# EAGLE board CT_schematic (EAGLE 7.6.0)

Size 100 x 80 mm. Coordinates in mm from the lower left corner, seen from the top.
Outline: 0,0 100,0 100,80 0,80 0,0
Copper layers (1*16): Top 0.035mm / dielectric 1.5mm / Bottom 0.035mm
Design rules "default": minimum track width 10mil, minimum drill 24mil, track to track 8mil, track to pad 8mil, pad to pad 8mil, via to via 8mil, smd to smd 8mil, copper to edge 40mil, drill to drill 8mil, minimum pad ring 10mil, minimum via ring 8mil, stop-mask expansion 4mil, vias tented up to drill 0mil, thermal gap 10mil

## Footprints (pad centres in the part's own frame; a part is rotated, then mirrored left to right if it is on the bottom)
C0603 = smd 0.8 x 0.8: 1 -0.762,0; 2 0.762,0
C0402 = smd 0.5 x 0.5: 1 -0.508,0; 2 0.508,0
C1210 = smd 1.2 x 2.5: 1 -1.524,0; 2 1.524,0
C1206 = smd 1.3 x 1.6: 1 -1.524,0; 2 1.524,0
L0603 = smd 0.8 x 0.8: 1 -0.762,0; 2 0.762,0
R0603 = smd 0.8 x 0.8: 1 -0.762,0; 2 0.762,0
LQFP48 = smd 0.3 x 1.2: 1 -2.75,-4.25; 2 -2.25,-4.25; 3 -1.75,-4.25; 4 -1.25,-4.25; 5 -0.75,-4.25; 6 -0.25,-4.25; 7 0.25,-4.25; 8 0.75,-4.25; 9 1.25,-4.25; 10 1.75,-4.25; 11 2.25,-4.25; 12 2.75,-4.25; 25 2.75,4.25; 26 2.25,4.25; 27 1.75,4.25; 28 1.25,4.25; 29 0.75,4.25; 30 0.25,4.25; 31 -0.25,4.25; 32 -0.75,4.25; 33 -1.25,4.25; 34 -1.75,4.25; 35 -2.25,4.25; 36 -2.75,4.25 | smd 1.2 x 0.3: 13 4.25,-2.75; 14 4.25,-2.25; 15 4.25,-1.75; 16 4.25,-1.25; 17 4.25,-0.75; 18 4.25,-0.25; 19 4.25,0.25; 20 4.25,0.75; 21 4.25,1.25; 22 4.25,1.75; 23 4.25,2.25; 24 4.25,2.75; 37 -4.25,2.75; 38 -4.25,2.25; 39 -4.25,1.75; 40 -4.25,1.25; 41 -4.25,0.75; 42 -4.25,0.25; 43 -4.25,-0.25; 44 -4.25,-0.75; 45 -4.25,-1.25; 46 -4.25,-1.75; 47 -4.25,-2.25; 48 -4.25,-2.75
SAMTEC_FTSH-105-01-L-DV-K = smd 0.762 x 2.794: 1 -2.54,-2.032; 2 -2.54,2.032; 3 -1.27,-2.032; 4 -1.27,2.032; 5 0,-2.032; 6 0,2.032; 7 1.27,-2.032; 8 1.27,2.032; 9 2.54,-2.032; 10 2.54,2.032
FCI_10118193-0001LF = smd 0.4 x 1.35: 1 -1.3,2.675; 2 -0.65,2.675; 3 0,2.675; 4 0.65,2.675; 5 1.3,2.675 | smd 1.6 x 1.4: 6 -3.2,2.45; 7 3.2,2.45 | smd 1.9 x 1.9: 8 -1.2,0; 9 1.2,0 | hole 0.5: -3.3,0; 3.3,0
SOT143B = smd 1 x 0.7: 1 -0.75,-1 | smd 0.6 x 0.7: 2 0.95,-1; 3 0.95,1; 4 -0.95,1
ABS07-32.768KHZ-7-T = smd 1.1 x 2.4: 1 -2.5,0; 2 0,0
ASFL1 = smd 1.7 x 1.5: 1 -1.27,-1.1; 2 1.27,-1.1; 3 1.27,1.1; 4 -1.27,1.1
SOIC-8_EP = smd 1.6 x 0.533: 1 -2.921,1.905; 2 -2.921,0.635; 3 -2.921,-0.635; 4 -2.921,-1.905; 5 2.921,-1.905; 6 2.921,-0.635; 7 2.921,0.635; 8 2.921,1.905 | smd 2.54 x 3.302: EPAD 0,0 | drill 0.406 pad 0.406: P$1 -0.508,0.635; P$2 0.381,0.635; P$3 -0.508,-0.635; P$4 0.381,-0.635
DFN8_2X3MC = smd 0.813 x 0.305: 1 -1.398,0.75; 2 -1.398,0.25; 3 -1.398,-0.25; 4 -1.398,-0.75; 5 1.398,-0.75; 6 1.398,-0.25; 7 1.398,0.25; 8 1.398,0.75 | smd 1.753 x 1.549: 9 0,0
JST-2-SMD = smd 1 x 4.6: 1 -1,-3.7; 2 1,-3.7 | smd 1.6 x 3.4: NC1 -3.4,1.5; NC2 3.4,1.5
SON-6 = smd 0.55 x 0.3: 1 -0.355,0.5 | smd 0.52 x 0.3: 2 -0.37,0; 3 -0.37,-0.5; 4 0.37,-0.5; 5 0.37,0; 6 0.37,0.5
SW_4-1437565-2 = smd 1.4 x 2.1: 1 -2.23,4.55; 2 -2.23,-4.55; 3 2.23,4.55; 4 2.23,-4.55
LGM67K-G1J2-24-Z = smd 0.8 x 1.4: A -2,0; C 0,0
NC7SZ125M5X = smd 1.3 x 0.7: 1 -1.3,0.95; 2 -1.3,0; 3 -1.3,-0.95; 4 1.3,-0.95; 5 1.3,0.95
DUMMY_PACKAGE_116 = drill 0.3: 1 0,-1; 2 1.5,-1; 3 3,-1

## Placement (x,y rotation side)
C1  1e-07  [C0603]  -38.1,49.53 0 top  (outside the outline)
C2  1e-07  [C0603]  -41.91,49.53 0 top  (outside the outline)
C3  1e-07  [C0603]  -45.72,49.53 0 top  (outside the outline)
C4  1e-07  [C0603]  -49.53,49.53 0 top  (outside the outline)
C5  4.7e-06  [C0603]  -34.29,49.53 0 top  (outside the outline)
C6  1e-08  [C0603]  -53.34,49.53 0 top  (outside the outline)
C7  1e-06  [C0603]  -57.15,49.53 0 top  (outside the outline)
C8  1e-07  [C0603]  -60.96,49.53 0 top  (outside the outline)
C9  1e-11  [C0402]  -45.72,54.61 0 top  (outside the outline)
C10  1e-11  [C0402]  -49.53,54.61 0 top  (outside the outline)
C11  1e-07  [C0402]  -53.34,54.61 0 top  (outside the outline)
C12  1e-08  [C0402]  -57.15,54.61 0 top  (outside the outline)
C13  1e-05  [C1210]  -29.21,38.1 0 top  (outside the outline)
C14  1e-05  [C1210]  -35.56,38.1 0 top  (outside the outline)
C15  1e-05  [C1210]  -41.91,38.1 0 top  (outside the outline)
C16  1e-05  [C1210]  -48.26,38.1 0 top  (outside the outline)
C17  1e-07  [C0402]  -60.96,54.61 0 top  (outside the outline)
C18  1e-05  [C1206]  -54.61,38.1 0 top  (outside the outline)
C19  1e-05  [C1206]  -60.96,38.1 0 top  (outside the outline)
C20  1e-08  [C0402]  -15.24,59.69 0 top  (outside the outline)
C21  1e-08  [C0402]  -19.05,59.69 0 top  (outside the outline)
F1  240.0  [L0603]  -15.24,54.61 0 top  (outside the outline)
R1  10000.0  [R0603]  -46.99,44.45 0 top  (outside the outline)
R2  1000.0  [R0603]  -19.05,54.61 0 top  (outside the outline)
R3  1600.5  [R0603]  -22.86,54.61 0 top  (outside the outline)
R4  4700.0  [R0603]  -26.67,54.61 0 top  (outside the outline)
R5  10000.0  [R0603]  -52.07,44.45 0 top  (outside the outline)
R6  10000.0  [R0603]  -57.15,44.45 0 top  (outside the outline)
R7  10000.0  [R0603]  -62.23,44.45 0 top  (outside the outline)
R8  10000.0  [R0603]  -15.24,49.53 0 top  (outside the outline)
R9  5.0  [R0603]  -30.48,54.61 0 top  (outside the outline)
R10  4031.5447154472  [R0603]  -31.75,44.45 0 top  (outside the outline)
R11  2200.0  [R0603]  -34.29,54.61 0 top  (outside the outline)
R12  10000.0  [R0603]  -20.32,49.53 0 top  (outside the outline)
R13  10000.0  [R0603]  -25.4,49.53 0 top  (outside the outline)
R14  9100.0  [R0603]  -38.1,54.61 0 top  (outside the outline)
R15  680000.0  [R0603]  -36.83,44.45 0 top  (outside the outline)
R16  120000.0  [R0603]  -41.91,44.45 0 top  (outside the outline)
R17  2000.0  [R0603]  -41.91,54.61 0 top  (outside the outline)
R18  10000.0  [R0603]  -30.48,49.53 0 top  (outside the outline)
U1  STM32L052C6T6  [LQFP48]  -39.37,20.32 0 top  (outside the outline)
U2  FTSH-105-01-L-DV-K  [SAMTEC_FTSH-105-01-L-DV-K]  -35.56,7.62 0 top  (outside the outline)
U3  10118193-0001LF  [FCI_10118193-0001LF]  -19.05,29.21 0 top  (outside the outline)
U4  prtr5v0u2ax  [SOT143B]  -31.75,59.69 0 top  (outside the outline)
U5  ABS07-32.768KHZ-7-T  [ABS07-32.768KHZ-7-T]  -39.37,29.21 0 top  (outside the outline)
U6  ASFL1-25MHZ-NCS  [ASFL1]  -58.42,19.05 0 top  (outside the outline)
U7  MIC5234YME  [SOIC-8_EP]  -48.26,29.21 0 top  (outside the outline)
U8  MCP73831T-2ACI/MC  [DFN8_2X3MC]  -46.99,58.42 0 top  (outside the outline)
U9  S2B-PH-SM4-TB(LF)(SN)  [JST-2-SMD]  -22.86,21.59 0 top  (outside the outline)
U10  TPS3895ADRYR  [SON-6]  -40.64,58.42 0 top  (outside the outline)
U11  4-1437565-2  [SW_4-1437565-2]  -57.15,6.35 0 top  (outside the outline)
U12  Q65110A2395  [LGM67K-G1J2-24-Z]  -17.78,38.1 0 top  (outside the outline)
U13  nc7sz125m5x  [NC7SZ125M5X]  -15.24,43.18 0 top  (outside the outline)
U14  nc7sz125m5x  [NC7SZ125M5X]  -21.59,43.18 0 top  (outside the outline)
U15  Dummy  [DUMMY_PACKAGE_116]  -38.1,59.69 0 top  (outside the outline)

## Library data of the parts
C1-C21 F1 R1-R18 U1-U15 = circuit_tree

## Nets
CLK_CRYSTAL_U1_3: C9.1 U1.3 U5.1
CLK_CRYSTAL_U1_4: C10.1 U1.4 U5.2
CLK_U1_5: U1.5 U6.3
GND: C1.2 C2.2 C3.2 C4.2 C5.2 C6.2 C7.2 C8.2 C9.2 C10.2 C11.2 C12.2 C13.2 C14.2 C15.2 C16.2 C17.2 C18.2 C19.2 C20.2 C21.2 R2.2 R5.2 R9.2 R11.2 R14.2 R16.2 R17.2 U1.8 U1.23 U1.35 U1.47 U2.3 U2.5 U3.5 U3.6 U3.7 U3.8 U3.9 U4.1 U6.2 U7.7 U7.EPAD U8.6 U8.9 U9.2 U10.2 U12.C U13.2 U13.3 U14.1 U14.3 U15.1
INPUT_USBPOWER_5V: C18.1 R18.2 U3.1 U4.4 U8.1 U8.2
NET_U1_7: R4.1 U1.7 U14.4
NET_U1_9: C6.1 C7.1 F1.1 U1.9
NET_U1_44: R5.1 U1.44
NET_U1_45: R3.1 U1.45 U12.A
NET_U1_46: R1.1 U1.46 U11.3 U11.4
NET_U2_9: R9.1 U2.9
NET_U7_4: R10.2 R11.1 U7.4
NET_U8_5: R18.1 U8.5
NET_U8_8: R17.1 U8.8
NET_U10_1: R13.1 R14.1 U10.1
NET_U10_3: R15.2 R16.1 U10.3
NET_U10_4: R12.1 U10.4 U13.4 U14.2
NET_U11_1: R2.1 U11.1 U11.2
PROC_SYS_SWCLK: R7.1 U1.37 U2.4
PROC_SYS_SWDIO: R8.1 U1.34 U2.2
PROC_TIM2_CH1: U1.10 U15.3
PROC_TIM2_CH3: U1.12 U15.2
PROC_USB_DM: U1.32 U3.2 U4.3
PROC_USB_DP: U1.33 U3.3 U4.2
RST_OUT_U2_JTAG_RST_B: R6.1 U2.10 U13.1
VCC_S1_3V7: C13.1 C14.1 C19.1 U7.5 U7.8 U8.3 U8.4 U9.1
VCC_TIER1_3V3: C1.1 C2.1 C3.1 C4.1 C5.1 C8.1 C11.1 C12.1 C15.1 C16.1 C17.1 C20.1 C21.1 F1.2 R1.2 R3.2 R4.2 R6.2 R7.2 R8.2 R10.1 R12.2 R13.2 R15.1 U1.1 U1.24 U1.36 U1.48 U2.1 U6.4 U7.1 U10.6 U13.5 U14.5

## Tracks (layer width: path | path; a pad name or v marks a point on that pad's centre or on a via)
CLK_CRYSTAL_U1_3  (2 unrouted)
CLK_CRYSTAL_U1_4  (2 unrouted)
CLK_U1_5  (1 unrouted)
GND  (52 unrouted)
INPUT_USBPOWER_5V  (5 unrouted)
NET_U1_7  (2 unrouted)
NET_U1_9  (3 unrouted)
NET_U1_44  (1 unrouted)
NET_U1_45  (2 unrouted)
NET_U1_46  (3 unrouted)
NET_U2_9  (1 unrouted)
NET_U7_4  (2 unrouted)
NET_U8_5  (1 unrouted)
NET_U8_8  (1 unrouted)
NET_U10_1  (2 unrouted)
NET_U10_3  (2 unrouted)
NET_U10_4  (3 unrouted)
NET_U11_1  (2 unrouted)
PROC_SYS_SWCLK  (2 unrouted)
PROC_SYS_SWDIO  (2 unrouted)
PROC_TIM2_CH1  (1 unrouted)
PROC_TIM2_CH3  (1 unrouted)
PROC_USB_DM  (2 unrouted)
PROC_USB_DP  (2 unrouted)
RST_OUT_U2_JTAG_RST_B  (2 unrouted)
VCC_S1_3V7  (7 unrouted)
VCC_TIER1_3V3  (33 unrouted)